# EAGLE board schem1 (EAGLE 9.2.2)
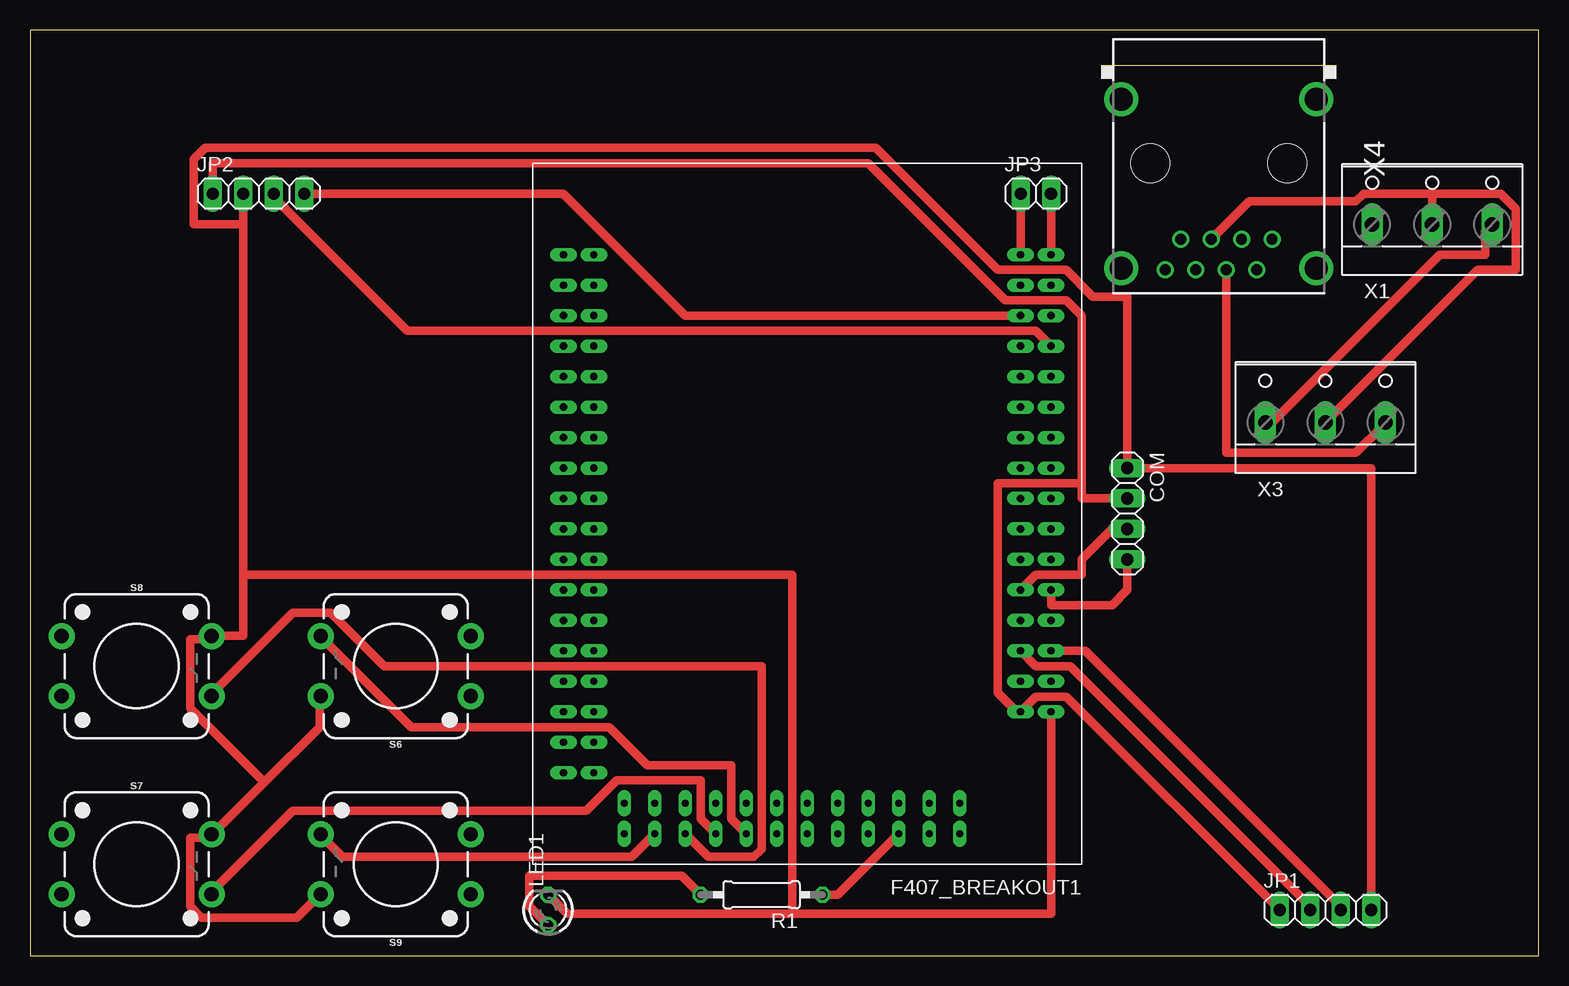
[diagram p0: board, top side]

Size 125.71 x 77.14 mm. Coordinates in mm from the lower left corner, seen from the top.
Outline: 0,0 125.71,0 125.71,77.14 0,77.14 0,0
Copper layers (1*16): Top 0.035mm / dielectric 1.5mm / Bottom 0.035mm
Design rules "default *": minimum track width 28mil, minimum drill 0.35mm, track to track 18mil, track to pad 14mil, pad to pad 6mil, via to via 6mil, smd to smd 6mil, copper to edge 40mil, drill to drill 6mil, minimum pad ring 10mil, minimum via ring 8mil, stop-mask expansion 4mil, vias tented up to drill 0mil, thermal gap 10mil

## Footprints (pad centres in the part's own frame; a part is rotated, then mirrored left to right if it is on the bottom)
1X04 = drill 1.016 long: 1 -3.81,0; 2 -1.27,0; 3 1.27,0; 4 3.81,0
STM32F407_BREAKOUT = drill 0.6 long: BOOT0 38.1,2.54; BOOT1 38.1,5.08; GND@1 0,0; GND@2 0,-35.56; GND@3 0,-38.1; GND@4 40.64,-30.48; GND@5 40.64,2.54; GND@6 40.64,5.08; GND@7 27.94,7.62; PA0 40.64,-25.4; PA1 38.1,-22.86; PA2 40.64,-22.86; PA3 40.64,-20.32; PA4 38.1,-17.78; PA5 40.64,-17.78; PA6 38.1,-15.24; PA7 40.64,-15.24; PA8 0,-2.54; PA9 2.54,-5.08; PA10 0,-5.08; PA11 2.54,-7.62; PA12 0,-7.62; PA13 2.54,-10.16; PA14 0,-10.16; PA15 2.54,-12.7; PB0 38.1,-10.16; PB1 40.64,-10.16; PB2 40.64,0; PB3 2.54,-27.94; PB4 0,-27.94; PB5 2.54,-30.48; PB6 0,-30.48; PB7 2.54,-33.02; PB8 38.1,-7.62; PB9 40.64,-7.62; PB10 30.48,7.62; PB11 27.94,10.16; PB12 25.4,10.16; PB13 22.86,7.62; PB14 22.86,10.16; PB15 20.32,7.62; PC0 38.1,-27.94; PC1 40.64,-27.94; PC2 38.1,-25.4; PC3 38.1,-20.32; PC4 38.1,-12.7; PC5 40.64,-12.7; PC6 10.16,10.16; PC7 7.62,7.62; PC8 7.62,10.16; PC9 2.54,-2.54; PC10 0,-12.7; PC11 2.54,-15.24; PC12 0,-15.24; PC13 40.64,-33.02; PD0 2.54,-17.78; PD1 0,-17.78; PD2 2.54,-20.32; PD3 0,-20.32; PD4 2.54,-22.86; PD5 0,-22.86; PD6 2.54,-25.4; PD7 0,-25.4; PD8 20.32,10.16; PD9 17.78,7.62; PD10 17.78,10.16; PD11 15.24,7.62; PD12 15.24,10.16; PD13 12.7,7.62; PD14 12.7,10.16; PD15 10.16,7.62; PE0 0,-33.02; PE1 38.1,-5.08; PE2 38.1,-38.1; PE3 40.64,-38.1; PE4 38.1,-35.56; PE5 40.64,-35.56; PE6 38.1,-33.02; PE7 40.64,-5.08; PE8 38.1,-2.54; PE9 40.64,-2.54; PE10 38.1,0; PE11 35.56,10.16; PE12 35.56,7.62; PE13 33.02,10.16; PE14 33.02,7.62; PE15 30.48,10.16; VCC@1 2.54,0; VCC@2 2.54,-35.56; VCC@3 38.1,-30.48; VCC@4 25.4,7.62; VCC@5 2.54,-38.1
1X02 = drill 1.016 long: 1 -1.27,0; 2 1.27,0
LED3MM = drill 0.813 octagon: A -1.27,0; K 1.27,0
0207/10 = drill 0.813 octagon: 1 -5.08,0; 2 5.08,0
TACTILE_SWITCH_PTH_12MM = drill 1.2 pad 2.159: 1 6.25,-2.5; 2 -6.25,-2.5; 3 6.25,2.5; 4 -6.25,2.5
W237-103 = drill 1.194 long: 1 -5,-1.29; 2 0,-1.29; 3 5,-1.29
RJ45-SHIELD2 = drill 0.9 pad 1.4: 1 -4.445,6.35; 2 -3.175,8.89; 3 -1.905,6.35; 4 -0.635,8.89; 5 0.635,6.35; 6 1.905,8.89; 7 3.175,6.35; 8 4.445,8.89 | drill 1.9 pad 2.5: S1 -8.128,-5.33; S2 8.128,-5.33; S3 -8.128,8.76; S4 8.128,8.76 | hole 3.251: -5.715,0; 5.715,0

## Placement (x,y rotation side)
COM  [1X04]  91.44,36.83 270 top
F407_BREAKOUT1  STM32F407_BREAKOUT  [STM32F407_BREAKOUT]  85.09,20.32 180 top
JP1  [1X04]  107.95,3.81 0 top
JP2  [1X04]  19.05,63.5 0 top
JP3  [1X02]  83.82,63.5 0 top
LED1  [LED3MM]  43.18,3.81 90 top
R1  [0207/10]  60.96,5.08 180 top
S6  MOMENTARY-SWITCH-SPST-PTH-12MM  [TACTILE_SWITCH_PTH_12MM]  30.48,24.13 180 top
S7  MOMENTARY-SWITCH-SPST-PTH-12MM  [TACTILE_SWITCH_PTH_12MM]  8.89,7.62 0 top
S8  MOMENTARY-SWITCH-SPST-PTH-12MM  [TACTILE_SWITCH_PTH_12MM]  8.89,24.13 0 top
S9  MOMENTARY-SWITCH-SPST-PTH-12MM  [TACTILE_SWITCH_PTH_12MM]  30.48,7.62 180 top
X1  [W237-103]  116.84,62.23 0 top
X3  [W237-103]  107.95,45.72 0 top
X4  RJ45-6L2-B  [RJ45-SHIELD2]  99.06,66.04 180 top

## Library data of the parts
COM JP1-JP3 = pinhead
F407_BREAKOUT1 = stm32f407breakout
LED1 = led
R1 = rcl; SPICEPREFIX: R
S6-S9 = SparkFun-Switches; PROD_ID: SWCH-09185; SF_SKU: COM-09190
X1 X3 = con-wago-500; MPN: 237-103; OC_FARNELL: unknown; OC_NEWARK: 18M7116
X4 = con-tycoelectronics; MPN: RJ45-6L2-B; OC_FARNELL: unknown; OC_NEWARK: 16R6096

## Nets
A+: X3.3 X4.4
B-: X1.2 X3.2 X4.5
EARTH: X1.3 X3.1
GND: COM.1 F407_BREAKOUT1.GND@1 JP1.4 JP2.2 LED1.K S6.3 S7.3 S8.3 S9.3
LED: F407_BREAKOUT1.PD14 R1.1
N$1: LED1.A R1.2
N$2: F407_BREAKOUT1.GND@3 JP3.2
N$3: X1.1
RX: F407_BREAKOUT1.PA10 JP1.3
SCL: F407_BREAKOUT1.PB6 JP2.3
SDA: F407_BREAKOUT1.PB7 JP2.4
SW1: F407_BREAKOUT1.PB12 S6.1
SW2: F407_BREAKOUT1.PB11 S7.1
SW3: F407_BREAKOUT1.PE15 S8.1
SW4: F407_BREAKOUT1.PE13 S9.1
SWCLK: COM.4 F407_BREAKOUT1.PA14
SWDIO: COM.3 F407_BREAKOUT1.PA13
TX: F407_BREAKOUT1.PA9 JP1.2
VBAT: F407_BREAKOUT1.VCC@5 JP3.1
VCC: COM.2 F407_BREAKOUT1.VCC@1 JP1.1 JP2.1

## Tracks (layer width: path | path; a pad name or v marks a point on that pad's centre or on a via)
A+
  Top 0.711: X4.4 99.7,41.91 110.49,41.91 112.71,44.13 X3.3 113.03,44.77
B-
  Top 0.711: X4.5 101.6,62.87 110.49,62.87 111.12,63.5 116.84,63.5 | X1.2 116.84,63.5 | 116.84,63.5 122.56,63.5 123.83,62.23 123.83,57.15 120.65,57.15 107.95,44.45 X3.2
EARTH
  Top 0.711: 103.19,44.45 X3.1 103.5,44.45 117.47,58.42 121.28,58.42 121.28,60.33 X1.3
GND
  Top 0.711: JP1.4 111.76,40.64 COM.1 91.44,54.93 88.58,54.93 86.36,57.15 80.65,57.15 70.49,67.31 14.61,67.31 13.65,66.36 13.65,60.96 17.78,60.96 | F407_BREAKOUT1.GND@1 85.09,3.49 63.5,3.49 | 63.5,3.49 44.77,3.49 LED1.K | 19.53,14.45 24.13,19.05 24.13,21.59 S6.3 | 19.53,14.45 15.24,10.16 S7.3 14.92,9.84 13.34,9.84 13.34,4.13 14.29,3.17 22.23,3.17 24.13,5.08 S9.3 | 17.78,31.75 17.78,26.67 15.24,26.67 S8.3 14.92,26.35 13.34,26.35 13.34,20.64 19.53,14.45 | 17.78,31.75 17.78,60.96 | 17.78,60.96 JP2.2 | 63.5,3.49 63.5,31.75 17.78,31.75
LED
  Top 0.711: F407_BREAKOUT1.PD14 67.31,5.08 R1.1
N$1
  Top 0.711: LED1.A 41.59,4.13 41.59,6.67 54.29,6.67 R1.2
N$2
  Top 0.711: JP3.2 F407_BREAKOUT1.GND@3
RX
  Top 0.711: F407_BREAKOUT1.PA10 87.95,25.4 109.22,4.13 JP1.3
SCL
  Top 0.711: F407_BREAKOUT1.PB6 83.82,52.07 31.43,52.07 20.32,63.18 JP2.3
SDA
  Top 0.711: F407_BREAKOUT1.PB7 54.61,53.34 44.45,63.5 JP2.4
SW1
  Top 0.711: F407_BREAKOUT1.PB12 58.42,11.43 58.42,15.88 51.43,15.88 48.26,19.05 31.75,19.05 24.45,26.35 S6.1
SW2
  Top 0.711: F407_BREAKOUT1.PB11 55.88,11.43 55.88,14.61 48.9,14.61 46.35,12.06 21.91,12.06 15.24,5.4 S7.1
SW3
  Top 0.711: F407_BREAKOUT1.PE15 56.52,8.26 60.32,8.26 60.96,8.89 60.96,24.13 29.53,24.13 25.08,28.57 21.91,28.57 15.24,21.91 S8.1
SW4
  Top 0.711: F407_BREAKOUT1.PE13 50.16,8.26 26.04,8.26 24.45,9.84 S9.1
SWCLK
  Top 0.711: COM.4 91.44,30.48 90.17,29.21 85.09,29.21 F407_BREAKOUT1.PA14
SWDIO
  Top 0.711: COM.3 90.17,35.56 87.63,33.02 87.63,31.75 83.82,31.75 F407_BREAKOUT1.PA13
TX
  Top 0.711: F407_BREAKOUT1.PA9 83.82,24.13 86.68,24.13 106.68,4.13 JP1.2
VBAT
  Top 0.711: JP3.1 F407_BREAKOUT1.VCC@5
VCC
  Top 0.711: JP1.1 86.36,21.59 83.82,21.59 F407_BREAKOUT1.VCC@1 82.23,20.32 80.65,21.91 80.65,39.37 87.63,39.37 | JP2.1 15.24,66.04 69.85,66.04 81.28,54.61 86.36,54.61 87.63,53.34 87.63,39.37 | 87.63,39.37 87.63,38.1 COM.2